# Altium PCB MainBoard.PcbDoc
Units mm, origin at the board's own origin, x right, y up, seen from the top; angles counter-clockwise.
Board outline 70 x 70 mm, 4 copper layers (Component Side, Ground Plane, Power Plane, Solder Side), stack 0.844 mm thick; 47 components, 36 nets, 182 pads, 53 vias.
Unrouted connection lines stored in the file: 56.
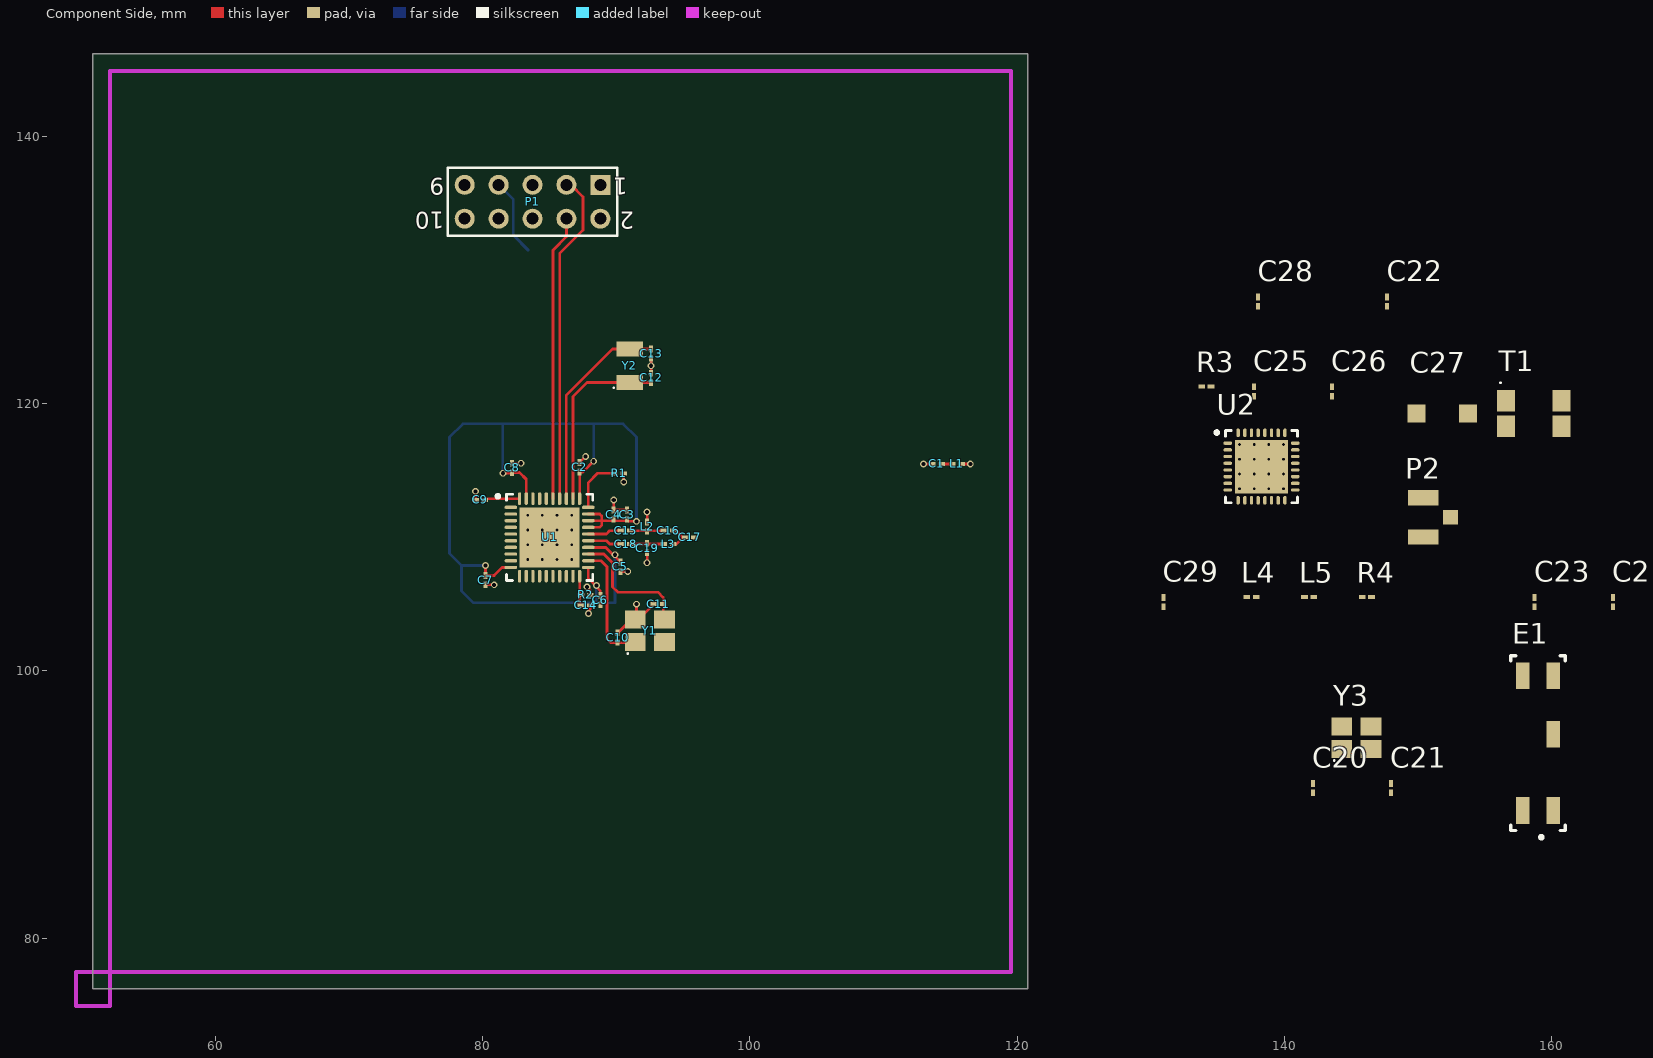
[diagram p0: Component Side view]
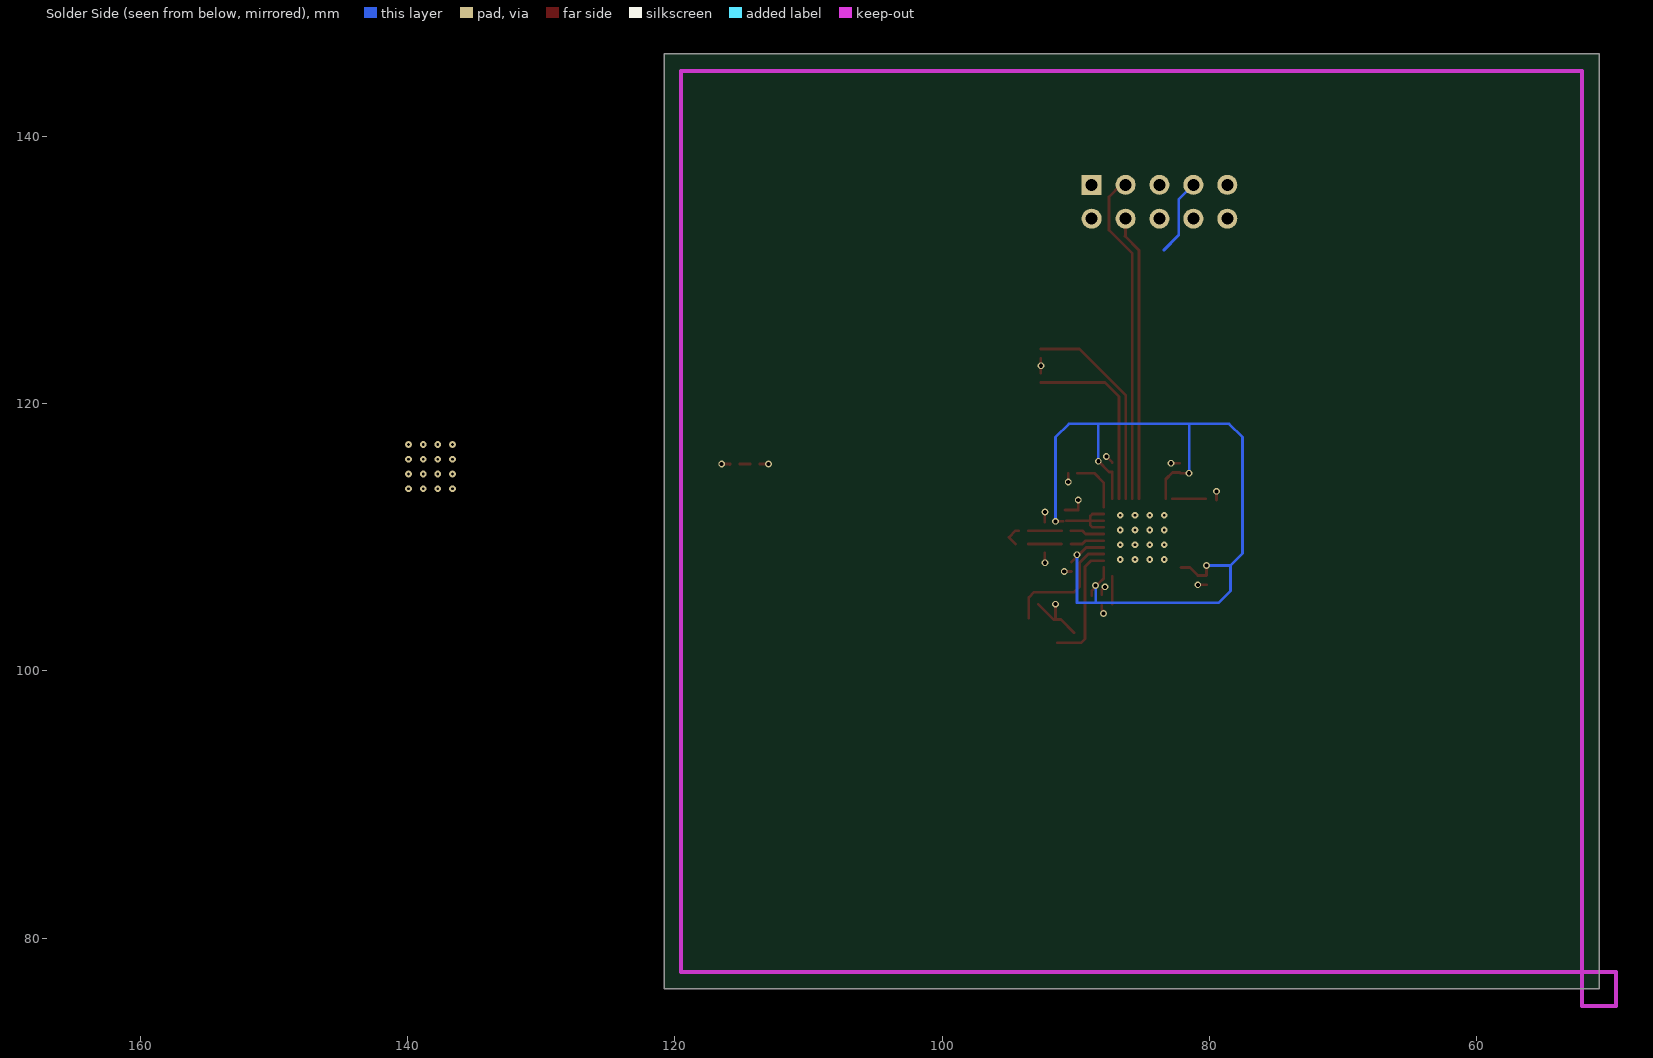
[diagram p1: Solder Side view, seen from below]
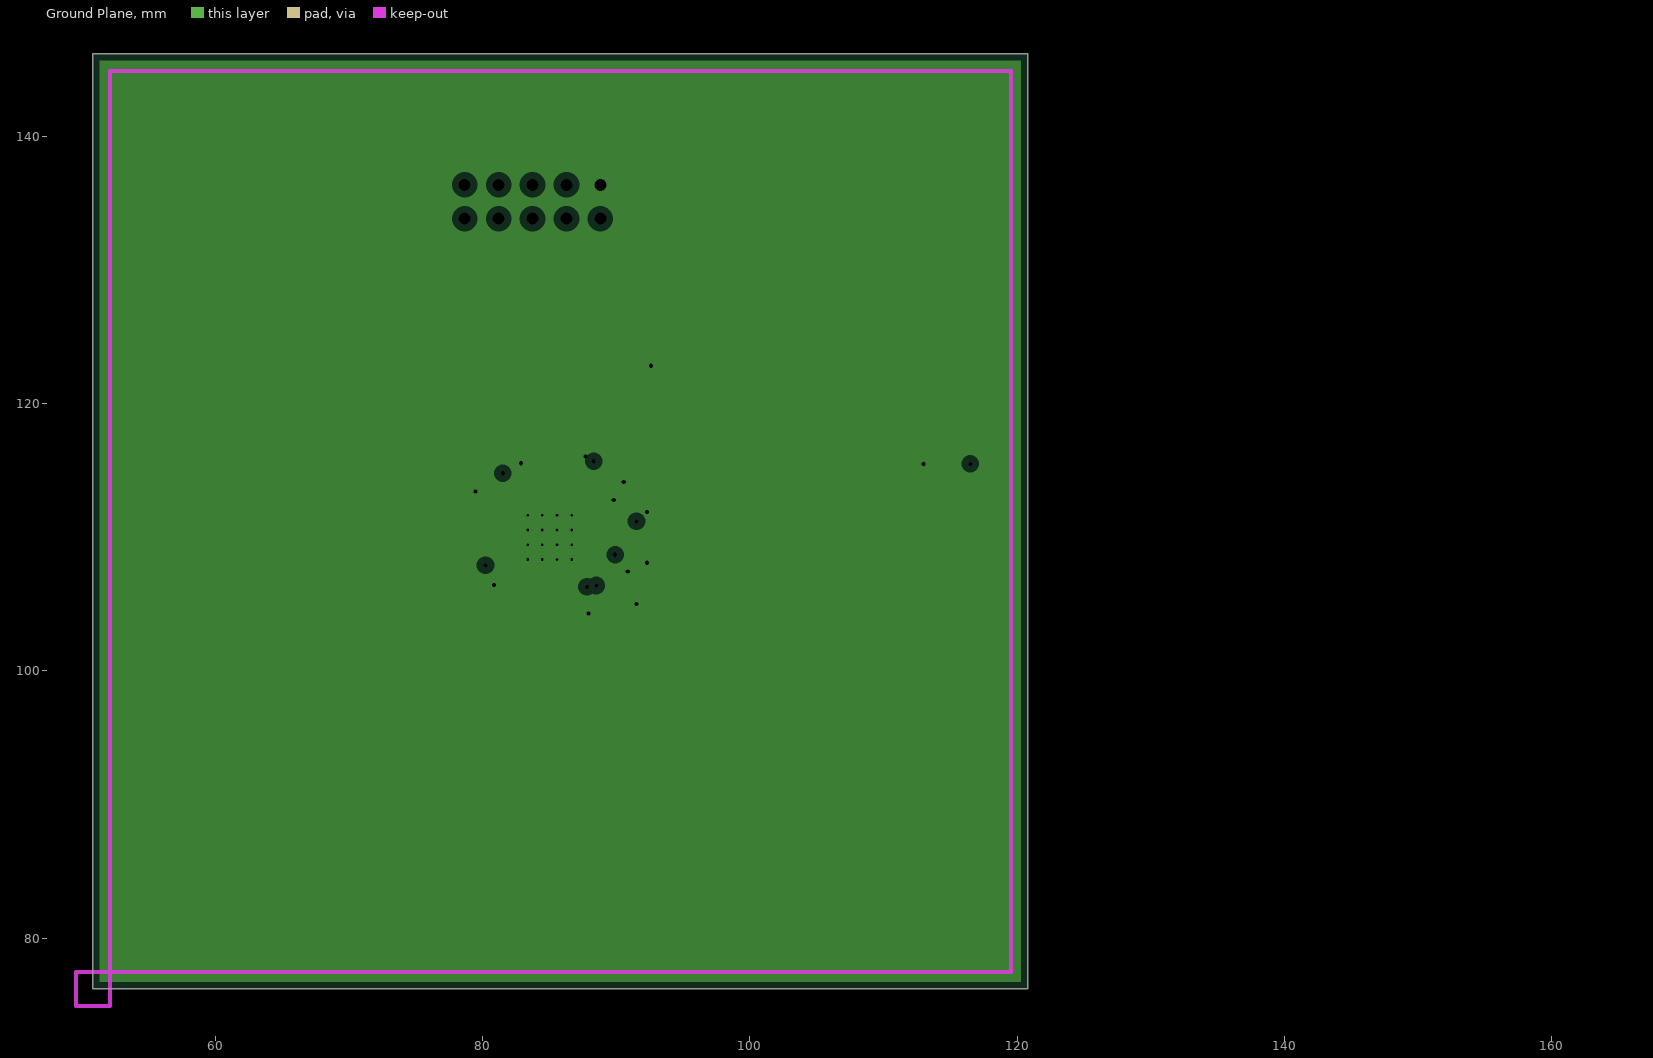
[diagram p2: Ground Plane, clearances drawn from the general rule]
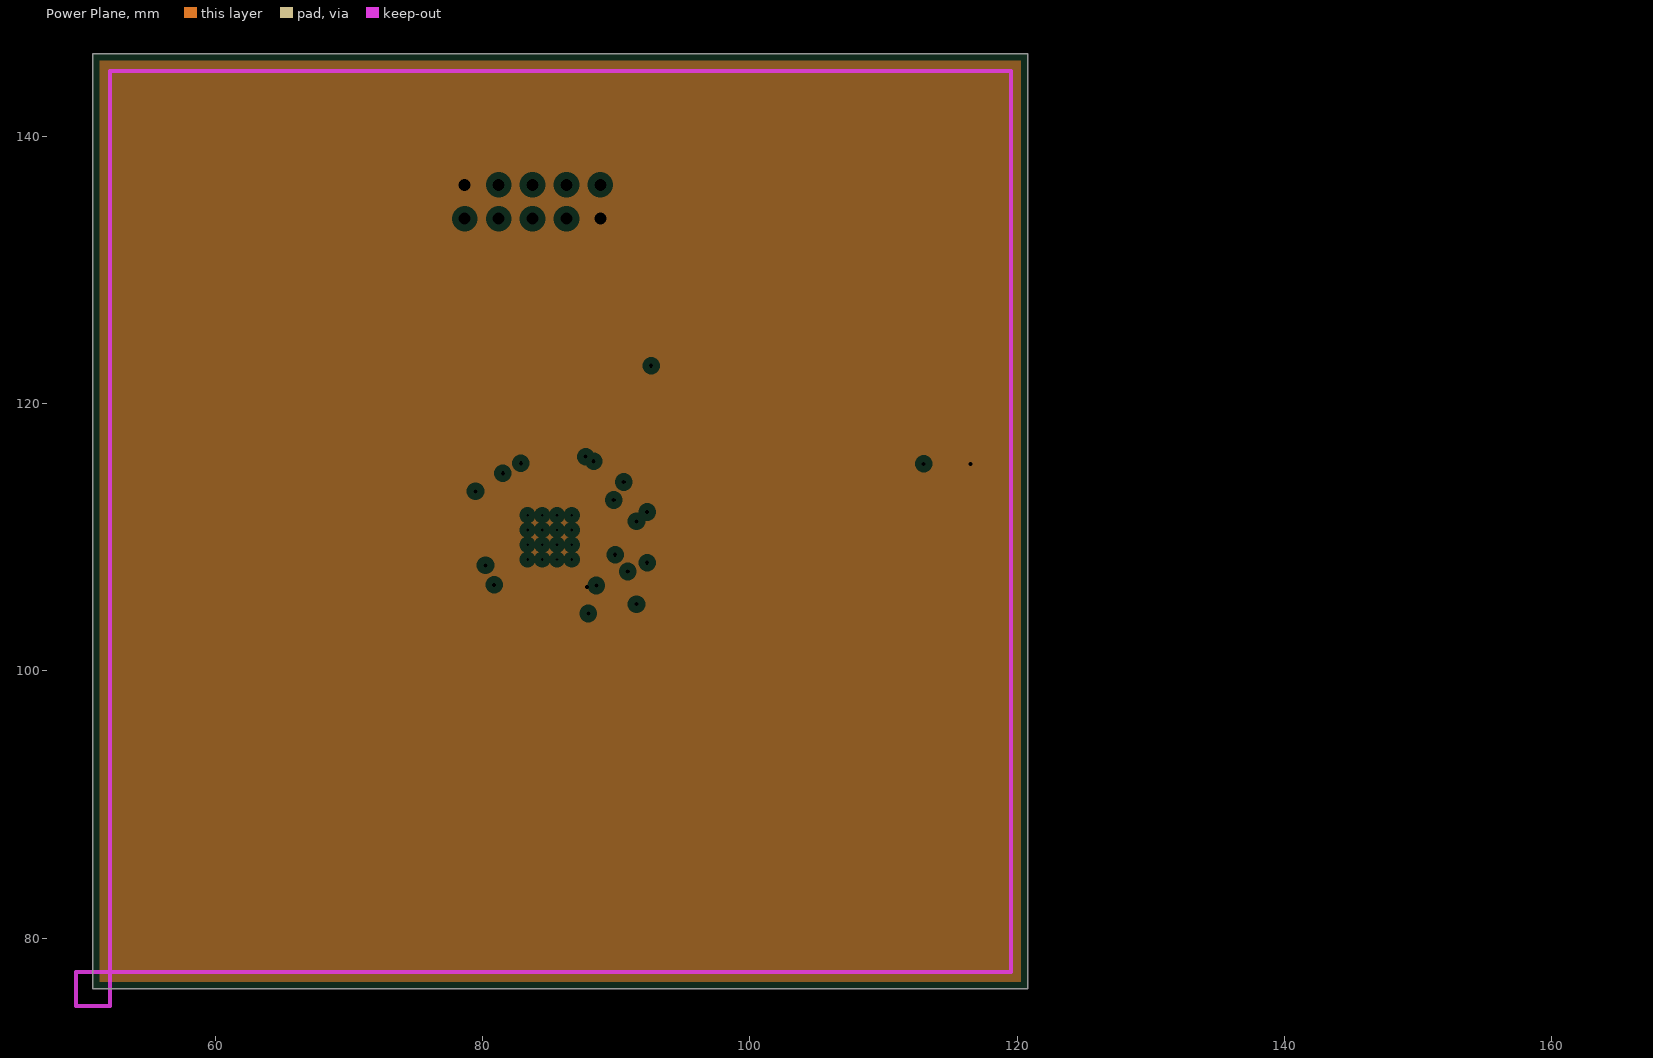
[diagram p3: Power Plane, clearances drawn from the general rule]

## Layer stack, top to bottom
Top Solder: solder mask 0.0102, Solder Resist, Dk 3.5
Component Side: signal copper 0.0356
Dielectric 1: core 0.32, FR-4, Dk 4.8
Ground Plane: plane copper 0.036, net GND
Dielectric 3: prepreg 0.127, Dk 4.2
Power Plane: plane copper 0.036, net SVDD
Dielectric 4: core 0.254, Dk 4.2
Solder Side: signal copper 0.0356
Bottom Solder: solder mask 0.0102, Solder Resist, Dk 3.5

## Board outline
50.8,76.2 120.8,76.2 120.8,146.2 50.8,146.2

## Design rules (kind name [scope] priority, off if disabled: settings)
Clearance [All] p1: gap=0.152
PlaneClearance [All] p1: clearance=0.508
PlaneConnect [All] p1: planeconnectstyle=Relief reliefexpansion=0.508 reliefentries=4 reliefconductorwidth=0.254 reliefairgap=0.254
PolygonConnect [All] p1: connectstyle=Relief reliefconductorwidth=0.254 reliefentries=4 polygonreliefangle="90 Angle" airgapwidth=0.254
RoutingCorners [All] p1: cornerstyle=45-Degree minsetback=0.762 maxsetback=2.54
RoutingVias [All] p1: holewidth=0.305 width=0.508 viastyle="Blind Buried (Adjacent Layers)" minholewidth=0.305 minwidth=0.508 maxholewidth=0.305 maxwidth=0.508
SolderMaskExpansion [All] p1: expansion=0.102
Width [All] p1: maxlimit=0.203 minlimit=0.203 preferedwidth=0.203
27 further rules are at their usual default settings.

## Components (designator, comment, footprint, x,y, rotation, side; value= is the part's Value field where it differs from the comment)
C1 "Cap" 0603 114,115.5 r0 top
C2 "Cap" 0603 87.25,115.25 r270 top
C3 "Cap" 0603 90.8,111.7 r270 top
C4 "Cap" 0603 89.8,111.7 r270 top
C5 "Cap" 0603 90.3,107.8 r90 top
C6 "Cap" 0603 88.8,105.3 r90 top
C7 "Cap" 0603 80.2,106.8 r90 top
C8 "Cap" 0603 82.2,115.2 r270 top
C9 "Cap" 0603 79.8,112.8 r0 top
C10 "Cap" 0603 90.1,102.5 r270 top
C11 "Cap" 0603 93.15,105 r0 top
C12 "Cap" 0603 92.6,121.95 r270 top
C13 "Cap" 0603 92.6,123.75 r90 top
C14 "Cap" 0603 87.7,104.9 r180 top
C15 "Cap" 0603 90.7,110.5 r0 top
C16 "Cap" 0603 93.9,110.5 r0 top
C17 "Cap" 0603 95.5,110 r0 top
C18 "Cap" 0603 90.7,109.5 r0 top
C19 "Cap" 0603 92.3,109.2 r90 top
C20 "Cap" 0603 142.154,91.226 r90 top
C21 "Cap" 0603 147.996,91.226 r90 top
C22 "Cap" 0603 147.7,127.65 r90 top
C23 "Cap" 0603 158.758,105.15 r90 top
C24 "Cap" 0603 164.6,105.15 r90 top
C25 "Cap" 0603 137.722,120.926 r90 top
C26 "Cap" 0603 143.564,120.926 r90 top
C27 "Cap Var" 4x4VC 151.819,119.275 r0 top
C28 "Cap" 0603 138.048,127.65 r90 top
C29 "Cap" 0603 130.945,105.15 r90 top
E1 "A5839" A5839 159,94.6 r90 top
L1 "Inductor" 0603 115.5,115.5 r0 top
L2 "Inductor" 0603 92.3,110.8 r90 top
L3 "Inductor" 0603 93.9,109.5 r0 top
L4 "Inductor" 0603 137.549,105.531 r0 top
L5 "Inductor" 0603 141.867,105.531 r0 top
P1 "Header 5X2" HDR2X5 88.8,136.4 r180 top
P2 "U.FL" U.FL 150.4,111.5 r0 top
R1 "Res2" 0603 90.2,114.8 r180 top
R2 "Res2" 0603 87.7,105.7 r180 top
R3 "Res2" 0603 134.166,121.307 r0 top
R4 "Res2" 0603 146.185,105.531 r0 top
T1 "1812WBT-3" 1812WBT-3 158.677,119.275 r0 top
U1 "CC2530" QFN40 85,110 r0 top
U2 "MFRC522" QFN32 138.3,115.3 r0 top
Y1 "XTAL" XTAL3225 92.5,103 r0 top
Y2 "XTAL" XTAL3215 91,122.85 r90 top
Y3 "XTAL" XTAL3225 145.4,95 r0 top

## Footprints (in the part's own frame and the unit in brackets; to place one, negate y for a bottom-side part, rotate by r counter-clockwise, add the part's x,y. Pads: shape width x height; smd on the part's side, far side on the other; paste and mask are expansions set on the pad)
4x4VC [mm] "DFN, 2-Leads, Body 4.50x4.00mm, Pitch 3.85mm, IPC Medium Density"
  rect 1.35x1.35 smd: 1(-1.9,0) 2(1.95,0)
  body extent -2.1,-2.26 2.1,2.26, height 3.2
0603 [mm] "Chip Inductor, Body 0.6x0.3mm, IPC High Density"
  rect 0.5x0.3 smd: 1(-0.35,0) 2(0.35,0)
  body extent -0.33,-0.18 0.33,0.18, height 0.55
1812WBT-3 [mm] "DFN, 4-Leads, Body 2.54x4.52mm, Pitch 4.14mm, IPC Medium Density"
  rect 1.35x1.6 smd: 1(-2.07,-0.955) 2(2.07,-0.955) 3(2.07,0.955) 4(-2.07,0.955)
  silkscreen extent -2.52,2.26 -2.43,2.35, body extent -2.3,-1.28 2.3,1.27, height 3.43
A5839 [mm]
  rect 2x1 smd: 1(-5.05,-1.15) 2(0.65,-1.15) 3(5.05,-1.15) 4(5.05,1.15) 5(-5.05,1.15)
  silkscreen extent -7.17,-2.05 6.55,2.05
HDR2X5 [mm] "Connector; Header; 5x2 Position"
  rect 1.5x1.5 hole 0.9: 1(0,0)
  round 1.5 hole 0.9: 2(0,2.54) 3(2.54,0) 4(2.54,2.54) 5(5.08,0) 6(5.08,2.54) 7(7.62,0) 8(7.62,2.54) 9(10.16,0) 10(10.16,2.54)
  silkscreen extent -1.27,-1.27 11.43,3.81
QFN32 [mm] "QFN, 32-Leads, Body 5.00x5.00mm, Pitch 0.50mm, Thermal Pad 4.00x4.00mm, IPC Medium Density"
  oval 0.65x0.25 smd: 1(-2.525,1.75) 2(-2.525,1.25) 3(-2.525,0.75) 4(-2.525,0.25) 5(-2.525,-0.25) 6(-2.525,-0.75) 7(-2.525,-1.25) 8(-2.525,-1.75) 17(2.525,-1.75) 18(2.525,-1.25) 19(2.525,-0.75) 20(2.525,-0.25) 21(2.525,0.25) 22(2.525,0.75) 23(2.525,1.25) 24(2.525,1.75)
  oval 0.25x0.65 smd: 9(-1.75,-2.525) 10(-1.25,-2.525) 11(-0.75,-2.525) 12(-0.25,-2.525) 13(0.25,-2.525) 14(0.75,-2.525) 15(1.25,-2.525) 16(1.75,-2.525) 25(1.75,2.525) 26(1.25,2.525) 27(0.75,2.525) 28(0.25,2.525) 29(-0.25,2.525) 30(-0.75,2.525) 31(-1.25,2.525) 32(-1.75,2.525)
  rect 4x4 smd: 33(0,0)
  silkscreen extent -3.47,-2.7 2.7,2.7, body extent -2.55,-2.55 2.55,2.55, height 1
QFN40 [mm] "QFN, 40-Leads, Body 6.00x6.00mm, Pitch 0.50mm, Thermal Pad 4.50x4.50mm, IPC Medium Density"
  oval 0.95x0.25 smd: 1(-2.9,2.25) 2(-2.9,1.75) 3(-2.9,1.25) 4(-2.9,0.75) 5(-2.9,0.25) 6(-2.9,-0.25) 7(-2.9,-0.75) 8(-2.9,-1.25) 9(-2.9,-1.75) 10(-2.9,-2.25) 21(2.9,-2.25) 22(2.9,-1.75) 23(2.9,-1.25) 24(2.9,-0.75) 25(2.9,-0.25) 26(2.9,0.25) 27(2.9,0.75) 28(2.9,1.25) 29(2.9,1.75) 30(2.9,2.25)
  oval 0.25x0.95 smd: 11(-2.25,-2.9) 12(-1.75,-2.9) 13(-1.25,-2.9) 14(-0.75,-2.9) 15(-0.25,-2.9) 16(0.25,-2.9) 17(0.75,-2.9) 18(1.25,-2.9) 19(1.75,-2.9) 20(2.25,-2.9) 31(2.25,2.9) 32(1.75,2.9) 33(1.25,2.9) 34(0.75,2.9) 35(0.25,2.9) 36(-0.25,2.9) 37(-0.75,2.9) 38(-1.25,2.9) 39(-1.75,2.9) 40(-2.25,2.9)
  rect 4.5x4.5 smd: 41(0,0)
  silkscreen extent -4,-3.22 3.22,3.22, body extent -3.08,-3.08 3.08,3.08, height 1
U.FL [mm] "DFN, 3-Leads, Body 3.00x3.10mm, Pitch 2.05mm, IPC Medium Density"
  rect 1.15x1.1 smd: 1(2.05,0)
  rect 2.3x1.15 smd: 2(0,-1.475) 2(0,1.475)
  body extent -1.55,-1.5 1.55,1.5, height 1.25
XTAL3215 [mm] "DFN, 2-Leads, Body 1.50x3.20mm, Pitch 2.50mm, IPC Medium Density"
  rect 1.15x1.95 smd: 1(-1.25,0) 2(1.25,0)
  silkscreen extent -1.7,1.15 -1.6,1.25, body extent -1.65,-0.8 1.65,0.8, height 0.75
XTAL3225 [mm] "DFN, 4-Leads, Body 2.50x3.20mm, Pitch 2.20mm, IPC Medium Density"
  rect 1.55x1.35 smd: 1(-1.1,-0.85) 2(1.1,0.85) 3(1.1,-0.85) 4(-1.1,0.85)
  silkscreen extent -1.7,-1.75 -1.6,-1.65, body extent -1.65,-1.3 1.65,1.3, height 0.8

## Part data
C1 C2 C3 C4 C5 C6 C7 C8 C9 C10 C11 C12 C13 C14 C15 C16 C17 C18 C19 C20 C21 C22 C23 C24 C25 C26 C28 C29: "Capacitor"
C27: "Variable or Adjustable Capacitor"
P1: "Header, 5-Pin, Dual row"
P2: library part SMB, "SMB Straight Connector"
R1 R2 R3 R4: "Resistor"
Y1 Y2 Y3: "Crystal Oscillator"

## Via types
v1: diameter 0.5, hole 0.2, Component Side to Solder Side, 32 vias
v2: diameter 0.508, hole 0.305, Component Side to Solder Side, 21 vias

## Nets (pads, with @x,y where several pads share a name; then routed paths per layer and width w, separated by ;. In a path a pad name is that pad's centre, name@x,y a point inside that pad or via, vN(x,y) a via of type N, cw(c..) or ccw(c..) an arc to the next point about the centre after c; other vN are vias at no path point)
DC: P1.3 U1.34 | length 24.9
  Component Side w0.203: U1.34 85.75,131.25 87.5,133 87.5,135.5 86.6,136.4 P1.3
DD: P1.4 U1.35 | length 21.4
  Component Side w0.203: U1.35 85.25,131.5 86.3,132.55 ; 86.26,132.59 P1.4 P1.4@86.3,133.82
EA: U1.8 U2.32
GND: C1.1 C2.1 C3.1 C4.1 C5.1 C6.1 C7.1 C8.1 C9.1 C10.1 C11.1 C12.1 C13.1 C14.1 C19.1 C20.1 C21.1 C22.1 E1.2 L2.2 P1.1 R1.1 U1.1 U1.2 U1.3 U1.4 U1.41 U2.4 U2.5 U2.10 U2.18 U2.33 Y1.4 | length 14.1
  Component Side w0.203: C9.1 v2(79.45,113.45) ; C7.1 v2(80.85,106.45) ; C8.1 v2(82.85,115.55) ; C2.1 v2(87.7,116.05) ; v2(87.9,104.3) 87.9,104.5 88.05,104.65 C14.1 ; v2(89.8,112.8) C4.1 C3.1 ; C10.1 91.1,103.85 Y1.4 91.65,103.85 C11.1 ; C5.1 v2(90.85,107.45) ; v2(90.55,114.15) R1.1 ; Y1.4@91.5,103.95 v2(91.5,105) ; v2(92.3,108.1) C19.1 ; L2.2 v2(92.3,111.9) ; C12.1 C13.1 ; v2(113,115.5) C1.1
  other v1: 83.35,108.35 84.45,108.35 85.55,108.35 86.65,108.35 83.35,109.45 84.45,109.45 85.55,109.45 86.65,109.45 83.35,110.55 84.45,110.55 85.55,110.55 86.65,110.55 83.35,111.65 84.45,111.65 85.55,111.65 86.65,111.65 136.65,113.65 137.75,113.65 138.85,113.65 139.95,113.65 136.65,114.75 137.75,114.75 138.85,114.75 139.95,114.75 136.65,115.85 137.75,115.85 138.85,115.85 139.95,115.85 136.65,116.95 137.75,116.95 138.85,116.95 139.95,116.95
  other v2: 92.6,122.85
IRQ: U1.7 U2.23
NetC1_2: C1.2 C2.2 C3.2 C4.2 C5.2 C6.2 C7.2 C8.2 L1.1 U1.10 U1.21 U1.24 U1.27 U1.28 U1.29 U1.31 U1.39 | length 80.1
  Component Side w0.203: v2(80.2,107.9) C7.2 80.85,107.15 81.45,107.75 U1.10 ; v2(81.5,114.8) C8.2@82.15,114.8 ; C8.2 82.75,114.85 83.25,114.35 U1.39 ; U1.31 C2.2 87.5,114.9 v2(88.3,115.7) ; U1.21 87.9,106.9 87.992,106.808 88.01,106.808 88.308,106.51 88.308,106.492 88.8,106 C6.2 ; U1.24 89.2,109.25 C5.2 ; U1.27 88.75,110.75 88.9,110.9 88.9,111.25 ; U1.28 88.9,111.25 ; U1.29 88.75,111.75 88.9,111.6 88.9,111.25 ; C3.2@90.7,111.25 88.9,111.25 ; 90.95,111.2 v2(91.5,111.2) ; C1.2 L1.1
  Solder Side w0.203: v2(80.2,107.9) 78.4,107.9 ; v2(81.5,114.8) 81.5,118.5 ; v2(88.3,115.7) 88.3,118.5 ; v2(88.5,106.4) 88.5,105.2 88.4,105.1 ; v2(89.9,108.7) 89.9,105.1 88.4,105.1 ; v2(91.5,111.2) 91.5,117.5 90.5,118.5 88.3,118.5 ; 78.4,107.9 77.5,108.8 77.5,117.5 78.5,118.5 81.5,118.5 ; 78.4,107.9 78.4,106 79.3,105.1 88.4,105.1 ; 81.5,118.5 88.3,118.5
NetC9_2: C9.2 U1.40 | length 2.5
  Component Side w0.203: C9.2@80.25,112.9 U1.40
NetC15_2: C15.2 C16.1 L2.1 | length 2.4
  Component Side w0.203: C15.2 L2.1@92.25,110.5 ; L2.1@92.35,110.5 C16.1
NetC16_2: C16.2 C17.1 L3.2 | length 1.7
  Component Side w0.203: C16.2 94.5,110.5 95,110 L3.2@94.5,109.5
NetC17_2: C17.2 E1.1
NetC18_2: C18.2 C19.2 L3.1 | length 2.4
  Component Side w0.203: C18.2 C19.2@92.25,109.5 ; C19.2@92.35,109.5 L3.1
NetC23_2: C23.2 C25.1 L4.2
NetC24_1: C24.1 C26.1 C27.1 L5.2
NetC25_2: C25.2 C28.1 T1.4
NetC26_2: C26.2 C27.2 T1.1
NetC28_2: C28.2 R3.2
NetP2_1: P2.1 T1.3
NetR1_2: R1.2 U1.30 | length 4.1
  Component Side w0.203: U1.30 87.9,114.1 88.6,114.8 R1.2
RESETN: C14.2 P1.7 R2.2 U1.20 | length 7.9
  Component Side w0.203: C14.2@87.25,105 U1.20
  Solder Side w0.203: P1.7 82.28,135.3 82.28,132.62 83.4,131.5
RF_N: C15.1 U1.26 | length 2.6
  Component Side w0.203: U1.26 89.25,110.25 89.5,110.5 C15.1
RF_P: C18.1 U1.25 | length 2.6
  Component Side w0.203: U1.25 89.25,109.75 89.5,109.5 C18.1
RSTPDN: U1.6 U2.6
RX: R3.1 R4.2 U2.17
SCL: U1.5 U2.31
SDA: U1.9 U2.24
SVDD: C22.2 L1.2 P1.2 P1.9 R2.1 U2.1 U2.2 U2.3 U2.7 U2.9 U2.12 U2.15 | length 1.4
  Component Side w0.203: v2(87.8,106.3) 88.05,106.05 R2.1 ; L1.2 115.9,115.45 115.95,115.5 v2(116.5,115.5)
TVSS: C23.1 C24.2 C29.1 P2.2 T1.2 U2.14
TX1: L4.1 U2.11
TX2: L5.1 U2.13
VMID: C29.2 R4.1
XTAL27M121: C20.2 U2.22 Y3.1
XTAL27M122: C21.2 U2.21 Y3.2
XTAL32K1: C12.2 U1.32 Y2.1 | length 15.1
  Component Side w0.203: U1.32 86.75,120.55 87.8,121.6 92.2,121.6 ; Y2.1 C12.2
XTAL32K2: C13.2 U1.33 Y2.2 | length 16.7
  Component Side w0.203: U1.33 86.25,120.65 89.7,124.1 92.2,124.1 ; Y2.2 C13.2
XTAL32M1: C10.2 U1.22 Y1.1 | length 9.2
  Component Side w0.203: U1.22 88.85,108.25 89.3,107.8 89.3,102.4 89.6,102.1 Y1.1@91.35,102.1
XTAL32M2: C11.2 U1.23 Y1.2 | length 9.6
  Component Side w0.203: U1.23 89.05,108.75 89.7,108.1 89.7,106.3 90.1,105.9 93.1,105.9 93.5,105.5 C11.2 Y1.2@93.5,103.95
pads on no net: E1.3 E1.4 E1.5 P1.5 P1.6 P1.8 P1.10 U1.11 U1.12 U1.13 U1.14 U1.15 U1.16 U1.17 U1.18 U1.19 U1.36 U1.37 U1.38 U2.8 U2.16 U2.19 U2.20 U2.25 U2.26 U2.27 U2.28 U2.29 U2.30 Y1.3 Y3.3 Y3.4

## Polygon pours and split planes (outlines as drawn)
GND on Ground Plane (split plane): 120.29,76.71 51.31,76.71 51.31,145.69 120.29,145.69
SVDD on Power Plane (split plane): 120.29,76.71 51.31,76.71 51.31,145.69 120.29,145.69

## Keep-outs
Keep-Out Layer:
  lines w0.3: 52.07,77.47 119.53,77.47 119.53,144.93 52.07,144.93 52.07,77.47 ; 52.07,77.47 52.07,74.93 49.53,74.93 49.53,77.47 52.07,77.47

## Silkscreen, mask and mechanical layers (free items; w line width, h text height)
Drill Drawing:
  text ".LEGEND" at 125.88,81.28 h1.52
  text "Drill Drawing." at 125.88,78.74 h1.52

## Dimensions
50.8,76.2 to 52.07,77.47 on Mechanical 1
50.8,76.2 to 52.07,77.47 on Mechanical 1

## Text inside footprints (layer, text, board x,y; h text height)
P1: Top Overlay "10" at 77.116,134.368 h1.27 r180; Top Overlay "9" at 77.116,136.908 h1.27 r180; Top Overlay "1" at 90.832,136.908 h1.27 r180; Top Overlay "2" at 91.34,134.368 h1.27 r180